# Altium PCB Power-Monitor.PcbDoc
Units mil, origin at the board's own origin, x right, y up, seen from the top; angles counter-clockwise.
Board outline 2185.01 x 2140.14 mil, 2 copper layers (Top Layer, Bottom Layer); 54 components, 43 nets, 223 pads, 153 vias.
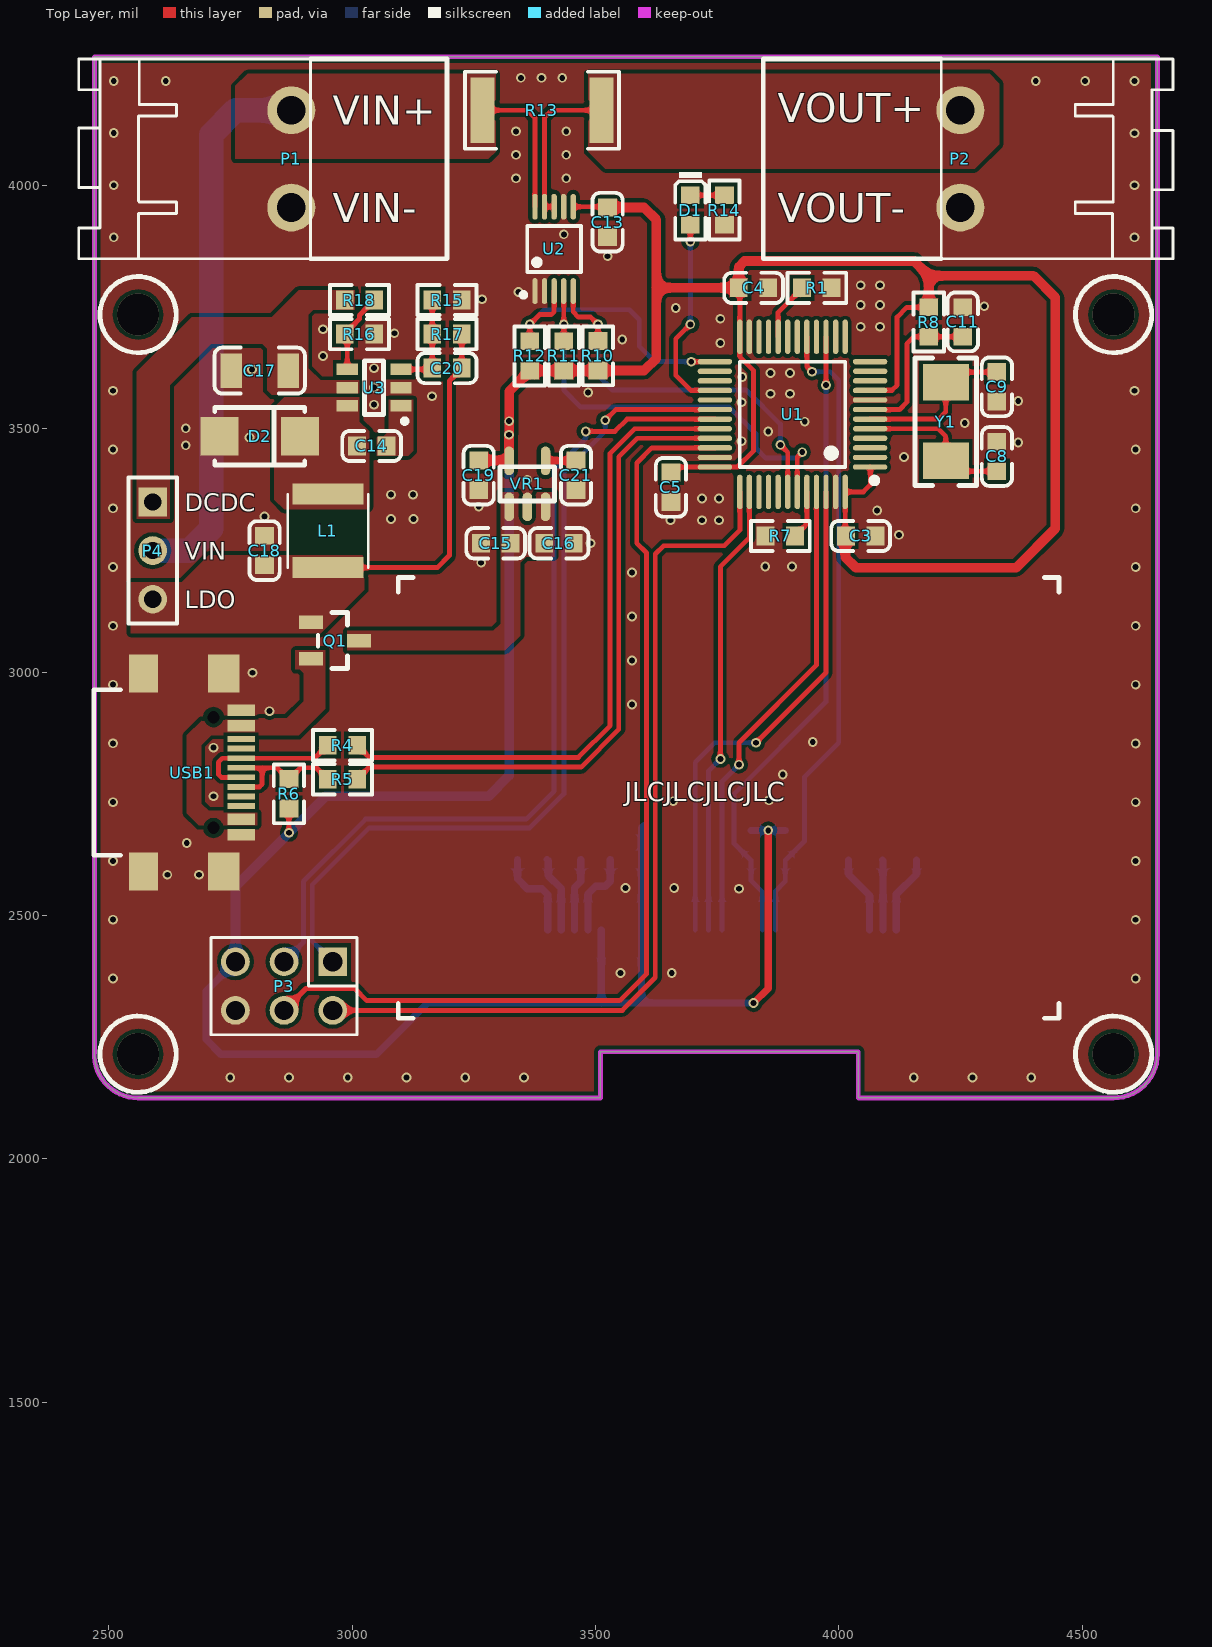
[diagram p0: Top Layer view]
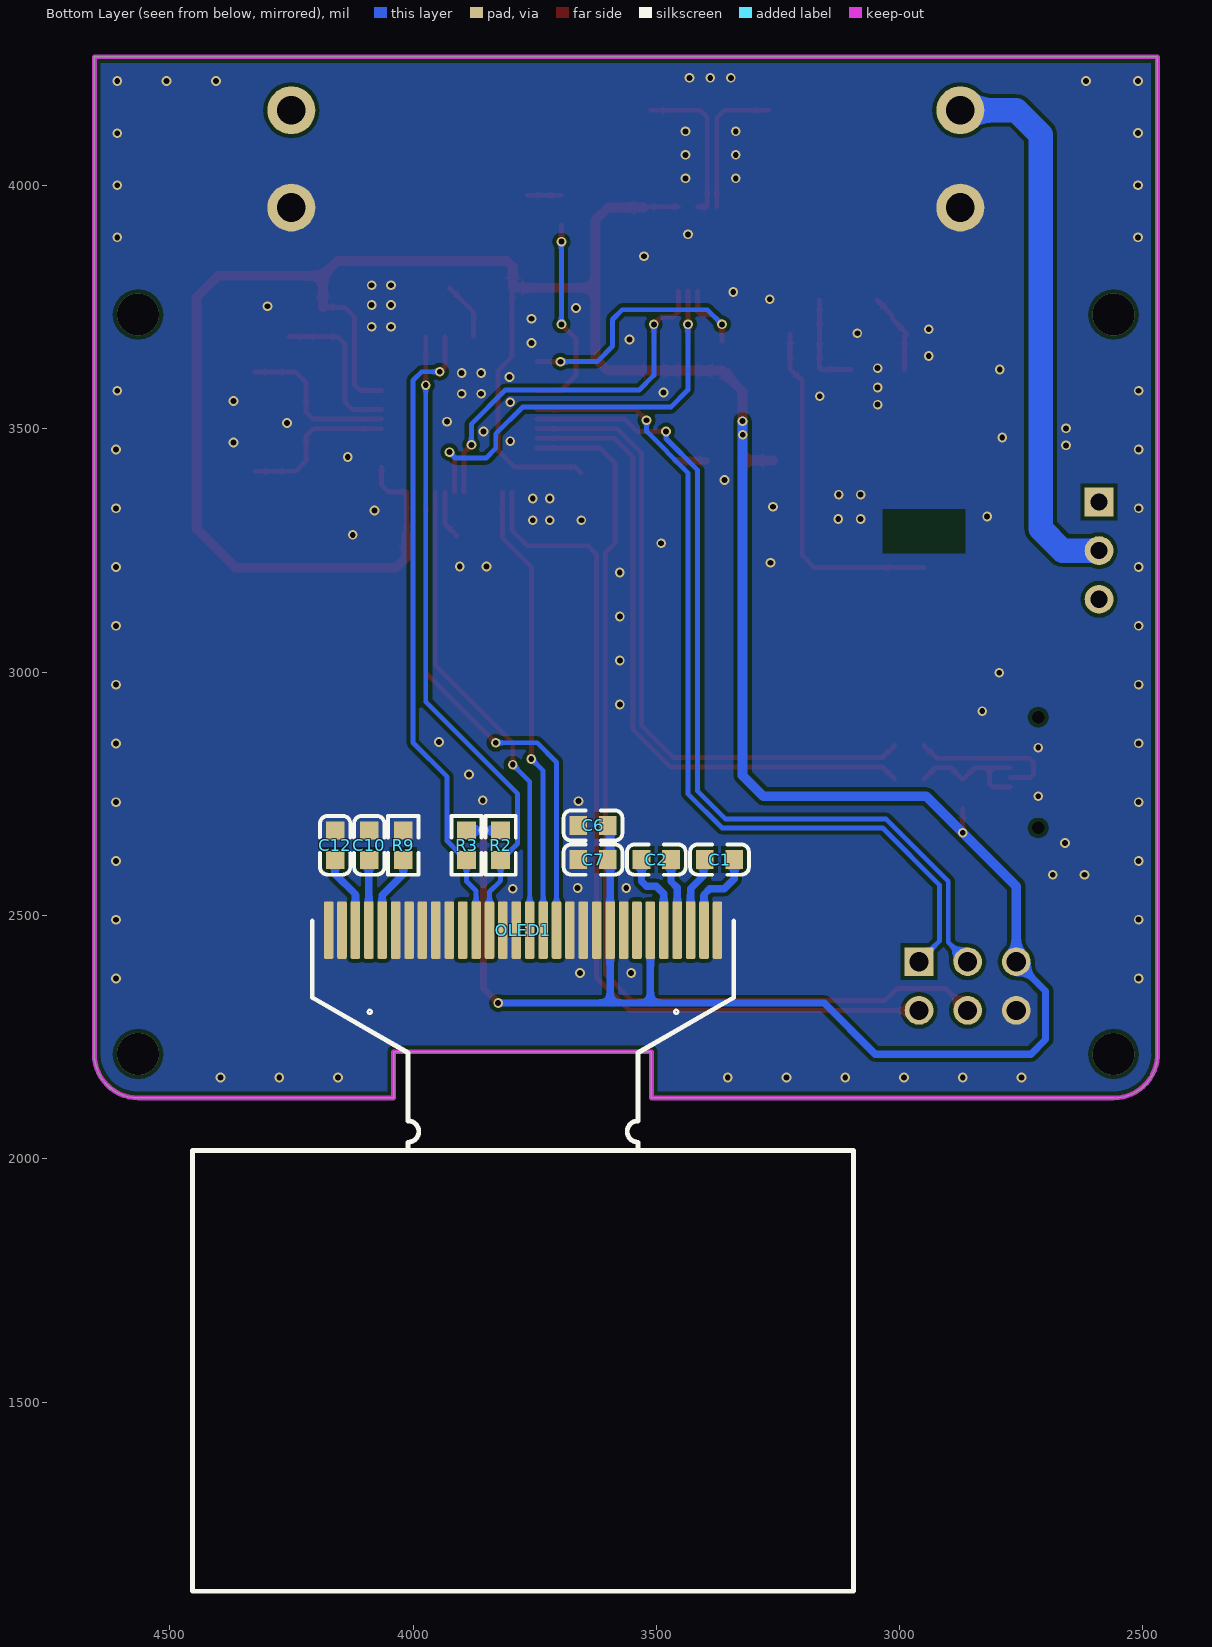
[diagram p1: Bottom Layer view, seen from below]
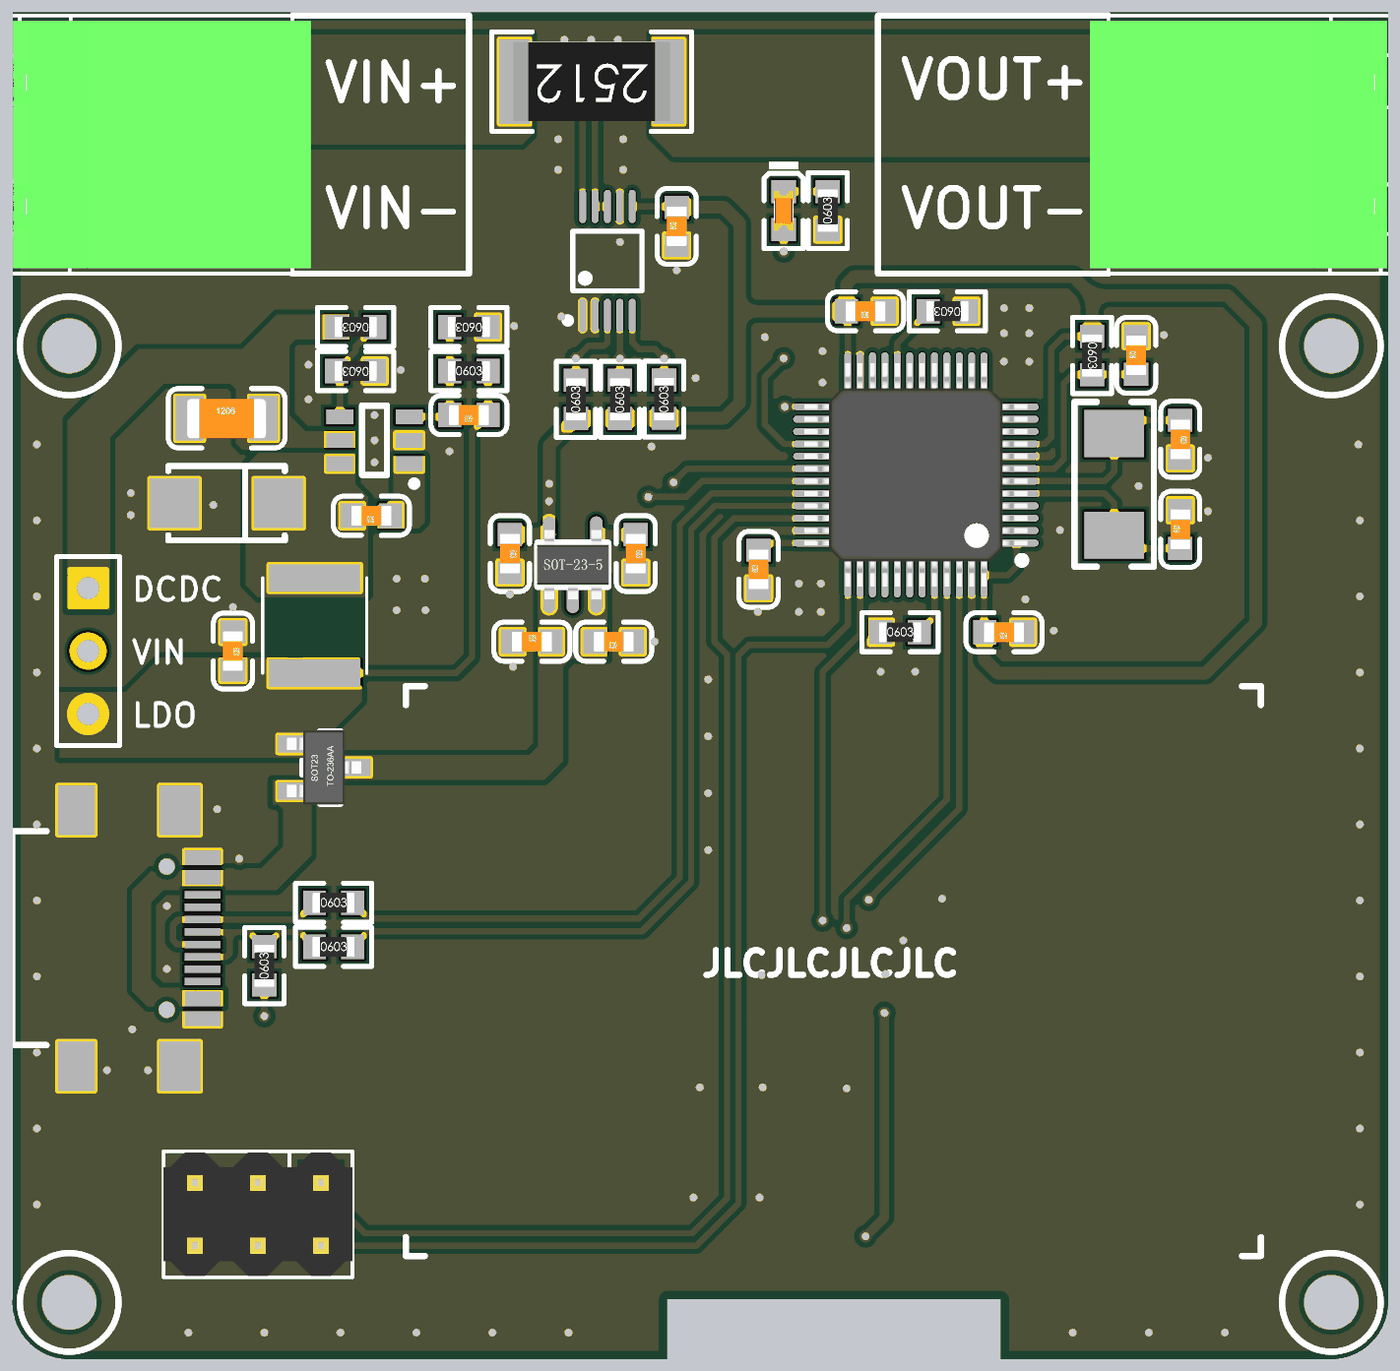
[diagram p2: 3D render of the assembled board from above, using the file's embedded part models]
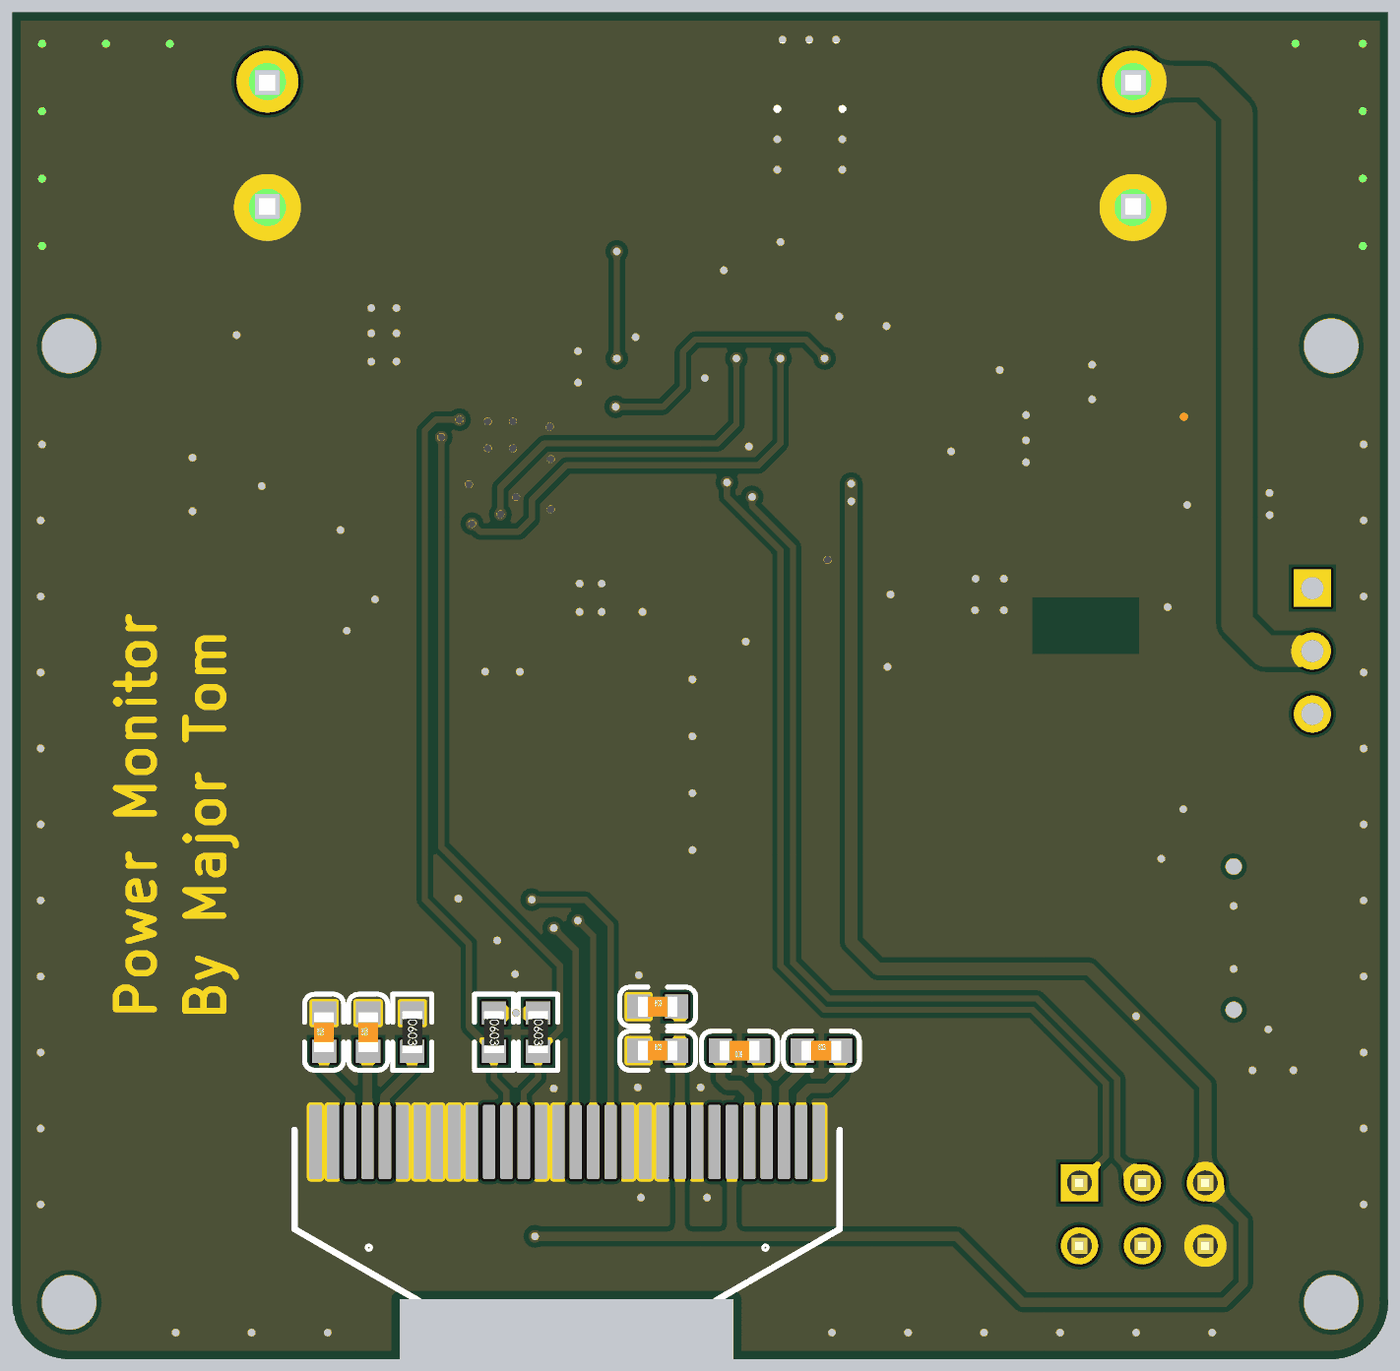
[diagram p3: 3D render of the assembled board from below, using the file's embedded part models]

## Layer stack, top to bottom
Top Solder: solder mask 0.4, Solder Resist, Dk 3.5
Top Layer: signal copper 1.4
Dielectric 1: dielectric 12.6, FR-4, Dk 4.8
Bottom Layer: signal copper 1.4
Bottom Solder: solder mask 0.4, Solder Resist, Dk 3.5

## Board outline
2470,2220 ccw(c2560,2215) 2560,2124.86 2560,2125 3510,2125 3510,2220 4040,2220 4040,2125 4565,2125 ccw(c4565,2215) 4655,2215 4655,4265 2470,4265

## Design rules (kind name [scope] priority, off if disabled: settings)
Clearance [All] p1: gap=8 ignorepadtopadclearanceinfootprint=TRUE except(0: Arc-Hole Track-Hole SMDPad-Hole THPad-Hole Via-Hole Fill-Hole Poly-Hole Region-Hole Text-Hole)
PolygonConnect PolygonConnect_5 [All vs IsNamedPolygon('+5V_BUS_L01_P020') Or IsNamedPolygon('+5V_L01_P022') Or IsNamedPolygon('+5V_USB_L01_P023') Or IsNamedPolygon('+24V_L01_P019') Or IsNamedPolygon('GND_L01_P024') Or IsNamedPolygon('NETC14_1_L01_P015') Or IsNamedPolygon('NETC14_2_L01_P014') Or IsNamedPolygon('VIN+_L01_P013') Or IsNamedPolygon('VIN-_L01_P012') Or IsNamedPolygon('GND_L02_P017')] p1: connectstyle=Direct reliefconductorwidth=10 reliefentries=4 polygonreliefangle="90 Angle" airgapwidth=10
PolygonConnect PolygonConnect_4 [All vs IsNamedPolygon('+5V_BUS_L01_P020') Or IsNamedPolygon('+5V_L01_P022') Or IsNamedPolygon('+5V_USB_L01_P021') Or IsNamedPolygon('+24V_L01_P019') Or IsNamedPolygon('GND_L01_P023') Or IsNamedPolygon('NETC14_1_L01_P015') Or IsNamedPolygon('NETC14_2_L01_P014') Or IsNamedPolygon('VIN+_L01_P013') Or IsNamedPolygon('VIN-_L01_P012') Or IsNamedPolygon('GND_L02_P017')] p2: connectstyle=Direct reliefconductorwidth=10 reliefentries=4 polygonreliefangle="90 Angle" airgapwidth=10
PolygonConnect PolygonConnect_3 [All vs IsNamedPolygon('+5V_BUS_L01_P021') Or IsNamedPolygon('+5V_L01_P024') Or IsNamedPolygon('+5V_USB_L01_P022') Or IsNamedPolygon('+24V_L01_P020') Or IsNamedPolygon('GND_L01_P019') Or IsNamedPolygon('NETC14_1_L01_P015') Or IsNamedPolygon('NETC14_2_L01_P014') Or IsNamedPolygon('VIN+_L01_P013') Or IsNamedPolygon('VIN-_L01_P012') Or IsNamedPolygon('GND_L02_P017')] p3: connectstyle=Direct reliefconductorwidth=10 reliefentries=4 polygonreliefangle="90 Angle" airgapwidth=10
PolygonConnect PolygonConnect_2 [All vs IsNamedPolygon('+5V_USB_L01_P016') Or IsNamedPolygon('+24V_L01_P018') Or IsNamedPolygon('GND_L01_P019') Or IsNamedPolygon('NETC14_1_L01_P015') Or IsNamedPolygon('NETC14_2_L01_P014') Or IsNamedPolygon('VIN+_L01_P013') Or IsNamedPolygon('VIN-_L01_P012') Or IsNamedPolygon('GND_L02_P017')] p4: connectstyle=Direct reliefconductorwidth=10 reliefentries=4 polygonreliefangle="90 Angle" airgapwidth=10
PolygonConnect PolygonConnect_1 [All vs IsNamedPolygon('NONET_L01_P008') Or IsNamedPolygon('NONET_L01_P009') Or IsNamedPolygon('NONET_L01_P010') Or IsNamedPolygon('NONET_L01_P006') Or IsNamedPolygon('NONET_L01_P005') Or IsNamedPolygon('NONET_L01_P003') Or IsNamedPolygon('NONET_L01_P001') Or IsNamedPolygon('NONET_L02_P009')] p5: connectstyle=Direct reliefconductorwidth=10 reliefentries=4 polygonreliefangle="90 Angle" airgapwidth=10
PolygonConnect [All] p6: connectstyle=Relief reliefconductorwidth=10 reliefentries=4 polygonreliefangle="90 Angle" airgapwidth=10
RoutingVias [All] p1: holewidth=28 width=50 viastyle="Through Hole" minholewidth=28 minwidth=50 maxholewidth=28 maxwidth=50
SolderMaskExpansion [All] p1: expansion=4 istentingtop=FALSE
Width [All] p1: maxlimit=50 minlimit=10 preferedwidth=10
30 further rules are at their usual default settings.

## Components (designator, comment, footprint, x,y, rotation, side; value= is the part's Value field where it differs from the comment)
C1 "1uF" 0603_C 3370,2615 r180 bottom
C2 "1uF" 0603_C 3500,2615 r0 bottom
C3 "104" 0603_C 4045,3280 r180 top
C4 "104" 0603_C 3825,3790 r180 top
C5 "104" 0603_C 3655,3380 r90 top
C6 "1uF" 0603_C 3630,2685 r180 bottom
C7 "1uF" 0603_C 3630,2615 r180 bottom
C8 "20pF" 0603_C 4325,3443.46 r90 top locked
C9 "20pF" 0603_C 4325,3586.54 r270 top locked
C10 "4.7uF" 0603_C 4090,2644.33 r90 bottom
C11 "103" 0603_C 4255,3720 r90 top
C12 "2.2uF" 0603_C 4160,2644.33 r90 bottom
C13 "104" 0603_C 3525,3925 r90 top
C14 "104" 0603_C 3040,3465 r180 top
C15 "104" 0603_C 3295,3265 r0 top
C16 "104" 0603_C 3425,3265 r180 top
C17 "4.7uF" 1206_C 2810,3620 r0 top
C18 "10uF" 0603_C 2820,3250 r270 top
C19 "10uF" 0603_C 3260,3405 r270 top
C20 "33pF" 0603_C 3195,3625 r180 top
C21 "104" 0603_C 3460,3405 r270 top
D1 "红灯 0603" 0603_LED_S1 3695,3950 r270 top
D2 "SS14" SMA(DO-214AC)_S1 2810,3485 r180 top
L1 "3.3uH" SMD,4.6x4.1x2.0mm 2950,3366.18 r270 top
OLED1 "SSD1306 1.3" "SSD1306 1.3'" 3295.55,2529.06 r0 bottom locked
P1 "Header 2" CDS-508H-2P 2875,3955 r90 top locked
P2 "Header 2" CDS-508H-2P 4250,4155 r270 top locked
P3 "Header 3X2" 201S2X3 2960,2405 r180 top
P4 "Header 3" HDR1X3 2590,3350 r270 top
Q1 "BAT54C" SOT-23(SOT-23-3) 2965,3065 r180 top
R1 "10K" 0603_R 3955,3790 r180 top
R2 "4.7K" 0603_R 3820,2644.33 r270 bottom
R3 "4.7K" 0603_R 3890,2644.33 r270 bottom
R4 "10Ω" 0603_R 2980,2850 r0 top
R5 "10Ω" 0603_R 2980,2780 r0 top
R6 "1.5KΩ" 0603_R 2870,2750 r90 top
R7 "10K" 0603_R 3880,3280 r0 top
R8 "10K" 0603_R 4185,3719.69 r270 top
R9 "910KΩ" 0603_R 4020,2644.33 r270 bottom
R10 "4.7K" 0603_R 3505,3650.31 r90 top
R11 "4.7K" 0603_R 3435,3650 r90 top
R12 "4.7K" 0603_R 3365,3650 r90 top
R13 "0.01R" 2512_R 3390,4155 r180 top
R14 "510" 0603_R 3765,3950 r90 top
R15 "23.7K" 0603_R 3195,3765 r180 top
R16 "20K" 0603_R 3015,3695 r180 top
R17 "124K" 0603_R 3195,3695 r0 top
R18 "100K" 0603_R 3015,3765 r180 top
U1 "STM32F103C8T6" LQFP-48_7x7x05P 3905,3530 r90 top locked
U2 "INA226" VSSOP-10 3415,3870 r0 top
U3 "MP2451DT" SOT-23-6 3045,3585 r0 top
USB1 "TYPE-C 12P" "TYPE-C 12P 贴片" 2468.94,2963.86 r270 top
VR1 "SPX3819M5-L-3-3" SOT-23-5 3322.6,3340 r90 top
Y1 "8MHz 20pF" SMD-5032_2P 4220,3515 r270 top locked

## Footprints (in the part's own frame and the unit in brackets; to place one, negate y for a bottom-side part, rotate by r counter-clockwise, add the part's x,y. Pads: shape width x height; smd on the part's side, far side on the other; paste and mask are expansions set on the pad)
201S2X3 [mm]
  rect 1.5x1.5 hole 1: 1(0,0)
  round 1.5 hole 1: 2(0,2.54) 3(2.54,0) 4(2.54,2.54) 5(5.08,0) 6(5.08,2.54)
  silkscreen extent -1.27,-1.27 6.35,3.81, body extent -1.27,-1.23 6.35,3.77, height 8.4
0603_C [mm]
  rect 0.93x0.98 smd: 1(-0.77,0) 2(0.77,0)
  silkscreen extent -1.53,-0.79 1.54,0.79, body extent -0.8,-0.4 0.8,0.4, height 0.3
0603_LED_S1 [mm]
  rect 0.93x0.98 smd: A(0.77,0) K(-0.77,0)
  silkscreen extent -1.98,-0.79 1.54,0.79, body extent -0.8,-0.4 0.8,0.4, height 0.6
0603_R [mm]
  rect 0.93x0.98 smd: 1(-0.77,0) 2(0.77,0)
  silkscreen extent -1.53,-0.79 1.54,0.79, body extent -0.85,-0.4 0.85,0.4, height 0.56
1206_C [mm]
  rect 1.13x1.8 smd: 1(-1.49,0) 2(1.49,0)
  silkscreen extent -2.36,-1.2 2.35,1.2, body extent -1.6,-0.81 1.6,0.79, height 1
2512_R [mm]
  rect 1.25x3.42 smd: 1(-3.1,0) 2(3.1,0)
  silkscreen extent -4.03,-2.01 4.02,2.01, body extent -3.16,-1.6 3.16,1.6, height 0.62
CDS-508H-2P [mm]
  round 2.5 hole 1.5: 1(0,0) 2(5.08,0)
  silkscreen extent -2.67,-1 7.75,11.1, body extent -2.46,-1.74 7.54,10.26, height 8.47
HDR1X3 [mm] "Connector; Header; 3 Position"
  rect 1.5x1.5 hole 0.9: 1(0,0)
  round 1.5 hole 0.9: 2(2.54,0) 3(5.08,0)
  silkscreen extent -1.27,-1.27 6.35,1.27
LQFP-48_7x7x05P [mm]
  oval 0.28x1.8 smd mask+0.051: 1(-2.75,-4.05) 2(-2.25,-4.05) 3(-1.75,-4.05) 4(-1.25,-4.05) 5(-0.75,-4.05) 6(-0.25,-4.05) 7(0.25,-4.05) 8(0.75,-4.05) 9(1.25,-4.05) 10(1.75,-4.05) 11(2.25,-4.05) 12(2.75,-4.05) 25(2.75,4.05) 26(2.25,4.05) 27(1.75,4.05) 28(1.25,4.05) 29(0.75,4.05) 30(0.25,4.05) 31(-0.25,4.05) 32(-0.75,4.05) 33(-1.25,4.05) 34(-1.75,4.05) 35(-2.25,4.05) 36(-2.75,4.05)
  oval 1.8x0.28 smd mask+0.051: 13(4.05,-2.75) 14(4.05,-2.25) 15(4.05,-1.75) 16(4.05,-1.25) 17(4.05,-0.75) 18(4.05,-0.25) 19(4.05,0.25) 20(4.05,0.75) 21(4.05,1.25) 22(4.05,1.75) 23(4.05,2.25) 24(4.05,2.75) 37(-4.05,2.75) 38(-4.05,2.25) 39(-4.05,1.75) 40(-4.05,1.25) 41(-4.05,0.75) 42(-4.05,0.25) 43(-4.05,-0.25) 44(-4.05,-0.75) 45(-4.05,-1.25) 46(-4.05,-1.75) 47(-4.05,-2.25) 48(-4.05,-2.75)
  silkscreen extent -3.6,-4.42 2.75,2.75, body extent -4.5,-4.5 4.5,4.5, height 1.6
SMA(DO-214AC)_S1 [mm]
  rect 2x2 smd: 1(2.1,0) 2(-2.1,0)
  silkscreen extent -2.35,-1.5 2.35,1.5
SMD,4.6x4.1x2.0mm [mm]
  rect 1.1x3.7 smd: 1(0,0) 2(3.84,0)
  silkscreen extent 0,-2.1 3.84,2.1
SMD-5032_2P [mm]
  rect 1.9x2.4 smd: 1(-2.05,0) 2(2.05,0)
  silkscreen extent -3.33,-1.6 3.32,1.6
SOT-23(SOT-23-3) [mm]
  rect 1.25x0.7 smd: 1(1.25,-0.95) 2(1.25,0.95) 3(-1.25,0)
  silkscreen extent -0.65,-1.46 0.9,1.46, body extent -1.5,-1.5 1.5,1.5, height 1.3
SOT-23-5 [mm]
  oval 1.5x0.5 smd: 1(0,0) 2(0,-0.95) 3(0,-1.9) 4(2.4,-1.9) 5(2.4,0)
  silkscreen extent 0.31,-2.38 2.09,0.48, body extent -0.2,-2.4 2.6,0.5, height 1.2
SOT-23-6 [mm]
  rect 1.1x0.6 smd: 1(1.4,-0.95) 2(1.4,0) 3(1.4,0.95) 4(-1.4,0.95) 5(-1.4,0) 6(-1.4,-0.95)
  silkscreen extent -0.5,-1.87 1.73,1.4
"SSD1306 1.3'" [mm]
  rrect30% 0.5x3 smd: 1(2,1.5) 2(2.7,1.5) 3(3.4,1.5) 4(4.1,1.5) 5(4.8,1.5) 6(5.5,1.5) 7(6.2,1.5) 8(6.9,1.5) 9(7.6,1.5) 10(8.3,1.5) 11(9,1.5) 12(9.7,1.5) 13(10.4,1.5) 14(11.1,1.5) 15(11.8,1.5) 16(12.5,1.5) 17(13.2,1.5) 18(13.9,1.5) 19(14.6,1.5) 20(15.3,1.5) 21(16,1.5) 22(16.7,1.5) 23(17.4,1.5) 24(18.1,1.5) 25(18.8,1.5) 26(19.5,1.5) 27(20.2,1.5) 28(20.9,1.5) 29(21.6,1.5) 30(22.3,1.5)
  silkscreen extent -5.1,1.02 29.4,36.02
"TYPE-C 12P 贴片" [mm]
  rect 2x1.65 smd: 0(-0.85,6.78) 0(9.49,6.78)
  rect 2x1.5 smd: 0(-0.85,2.6) 0(9.49,2.6)
  round 0 hole 0.65: 5(1.43,6.25) 5(7.21,6.25)
  rect 0.3x1.45 smd: A1(0.92,7.695) A4(1.72,7.695) A5(3.07,7.695) A6(4.07,7.695) A7(4.57,7.695) A8(5.57,7.695) A9(6.92,7.695) A12(7.72,7.695) B1(7.42,7.695) B4(6.62,7.695) B5(6.07,7.695) B6(5.07,7.695) B7(3.57,7.695) B8(2.57,7.695) B9(2.02,7.695) B12(1.22,7.695)
  silkscreen extent 0,0 8.64,1.4, body extent 0,0 8.64,8, height 3.21
VSSOP-10 [mm]
  oval 0.28x1.35 smd mask+0.051: 1(-1,-2.2) 2(-0.5,-2.2) 3(0,-2.2) 4(0.5,-2.2) 5(1,-2.2) 6(1,2.2) 7(0.5,2.2) 8(0,2.2) 9(-0.5,2.2) 10(-1,2.2)
  silkscreen extent -1.72,-2.52 1.4,1.2

## Part data
C1 C2 C3 C4 C5 C6 C7 C8 C9 C10 C12 C13 C14 C15 C16 C17 C18 C19 C20 C21: library part "0603 2.7pF (2R7) 0.25pF 50V", "贴片电容", Package=0603, SuppliersPartNumber=C16149, ComponentLink1Description=供应商链接, ComponentLink1URL=http://www.szlcsc.com/product/details_16831.html, Supplier=LC
C11: library part Cap, "Capacitor", LatestRevisionDate=17-Jul-2002, LatestRevisionNote="Re-released for DXP Platform.", PackageReference=RAD-0.3, Published=8-Jun-2000, Publisher="Altium Limited"
D1: library part "0805 红灯", "发光二极管", Package=0805, SuppliersPartNumber=C2295, ComponentLink1Description=供应商链接, ComponentLink1URL=http://www.szlcsc.com/product/details_2668.html, Supplier=LC
D2: library part "SMA(DO-214AC) SS54", "二极管", Package=SMA(DO-214AC), SuppliersPartNumber=C22452, ComponentLink1Description=供应商链接, ComponentLink1URL=http://www.szlcsc.com/product/details_23178.html, Supplier=LC
L1: library part 电感, "贴片电感"
P1 P2: "Header, 2-Pin", LatestRevisionDate=17-Jul-2002, LatestRevisionNote="Re-released for DXP Platform.", Publisher="Altium Limited"
P3: "Header, 3-Pin, Dual row", LatestRevisionDate=17-Jul-2002, LatestRevisionNote="Re-released for DXP Platform.", Publisher="Altium Limited"
P4: "Header, 3-Pin", LatestRevisionDate=17-Jul-2002, LatestRevisionNote="Re-released for DXP Platform.", Publisher="Altium Limited"
Q1: "BAT54C/KL3"
R1 R2 R3 R7 R8 R10 R11 R12 R13 R15 R16 R17 R18: library part Res2, "Resistor", LatestRevisionDate=17-Jul-2002, LatestRevisionNote="Re-released for DXP Platform.", PackageReference=AXIAL-0.4, Published=8-Jun-2000, Publisher="Altium Limited"
R4 R5 R6 R9 R14: library part "0603 330Ω (3300) 1%", "贴片电阻", Package=0603, SuppliersPartNumber=C23138, ComponentLink1Description=供应商链接, ComponentLink1URL=http://www.szlcsc.com/product/details_23865.html, Supplier=LC
U1: "ARM", Package=LQFP-48_7x7x05P, SuppliersPartNumber=C8734, ComponentLink1Description=供应商链接, ComponentLink1URL=http://www.szlcsc.com/product/details_9243.html, Supplier=LC
U3: "DCDC  36V 0.6A"
Y1: library part "SMD-5032_2P 8MHz 20ppm 20pF", "贴片晶振", Package=SMD-5032_2P, SuppliersPartNumber=C115962, ComponentLink1Description=供应商链接, ComponentLink1URL=http://www.szlcsc.com/product/details_117214.html, Supplier=LC

## Via types
v1: diameter 20, hole 12, Top Layer to Bottom Layer, tented both sides, 149 vias
v2: diameter 86.61, hole 86.61, Top Layer to Bottom Layer, 4 vias

## Nets (pads, with @x,y where several pads share a name; then routed paths per layer and width w, separated by ;. In a path a pad name is that pad's centre, name@x,y a point inside that pad or via, vN(x,y) a via of type N, cw(c..) or ccw(c..) an arc to the next point about the centre after c; other vN are vias at no path point)
+3.3V: C3.2 C4.2 C5.2 C6.2 C7.2 C13.2 C19.1 OLED1.6 OLED1.9 P3.5 R2.1 R3.1 R6.1 R8.1 R10.1 R11.1 R12.1 U1.1 U1.9 U1.24 U1.36 U1.48 U2.6 VR1.5 | length 7867.5
  Top Layer w10: v1(2870,2670) R6.1 ; U2.6 3523.7,3956.61 C13.2 ; C5.2 3666.42,3421.73 U1.36 3745.75,3421.93 3791.93,3421.93 3825,3455 3825,3620 3796.73,3648.27 U1.24 3796.73,3787.95 C4.2 ; C3.2 4013.27,3281.42 U1.48 4050.55,3370.55 4065,3385 4065,3421.26 4064.53,3421.73 U1.1 ; U1.9 4109.21,3579.21 4120,3590 4120,3730 4140,3750 R8.1
  Top Layer w15: VR1.5@3322.19,3434.9 3322.44,3434.65 VR1.5 ; v1(3825,2320) 3855,2350 v1(3855,2675)
  Top Layer w20: C19.1 VR1.5@3322.44,3435.31 ; VR1.5@3322.44,3434.65 VR1.5@3322.44,3435.31 ; VR1.5 3322.6,3435.16 VR1.5@3322.44,3435.31 ; R12.1 3364.02,3619.69 3355.71,3611.38 3355.71,3610.39 3322.6,3577.28 v1(3322.6,3516.04) 3322.6,3488.3 v1(3322.38,3488.08) 3322.44,3488.02 VR1.5@3322.44,3435.31 ; R12.1@3365,3620 R10.1 3600,3620 3625,3645 3625,3790 ; C13.2 3599.69,3955.31 3625,3930 3625,3790 ; C3.2@4013.27,3281.42 4013.27,3236.73 4035,3215 4365,3215 4445,3295 4445,3770 4400,3815 4185,3815 ; R8.1 4185,3815 ; 3625,3790 C4.2 3794.68,3833.28 3806.4,3845 4155,3845 4185,3815
  Bottom Layer w15: P3.5 2700,2345 2700,2245 2730,2215 3050,2215 3155,2320 3512.09,2320 ; OLED1.6 3512.09,2320 ; C6.2 3594.76,2680.08 OLED1.9 3594.76,2320 ; R2.1 R3.1 ; v1(3825,2320) 3594.76,2320 ; 3512.09,2320 3594.76,2320
  Bottom Layer w20: P3.5 2760,2560 v1(2870,2670) 2945,2745 3280,2745 3322.6,2787.6 v1(3322.6,3516.04)
+5V: C15.2 C16.2 Q1.3 VR1.1 VR1.3
+5V_BUS: C18.2 C20.1 L1.2 P4.3 Q1.1 R17.2 | length 725.8
  Top Layer w10: L1.2 3175,3215 3200,3240 3200,3598.7 3225.31,3624.02 C20.1 R17.2
+5V_USB: Q1.2 USB1.A4 USB1.A9 USB1.B4 USB1.B9
+24V: C17.2 P4.1 R18.2 U3.5
GND: C3.1 C4.1 C5.1 C6.1 C7.1 C8.2 C9.2 C10.2 C11.2 C12.2 C13.1 C15.1 C16.1 C17.1 C18.1 C19.2 C21.2 D2.1 OLED1.1 OLED1.8 OLED1.10 OLED1.11 OLED1.12 OLED1.16 OLED1.17 OLED1.21 OLED1.22 OLED1.23 OLED1.24 OLED1.25 OLED1.29 OLED1.30 P1.1 P2.2 P3.6 R1.1 R7.1 R9.1 R14.1 R15.1 R16.1 U1.8 U1.23 U1.35 U1.47 U2.1 U2.2 U2.7 U3.2 USB1.0 USB1.A1 USB1.A12 USB1.B1 USB1.B12 VR1.2
  other v1: 2749.25,2167.03 2870.03,2167.03 2990.8,2167.03 3111.57,2167.03 3232.35,2167.03 3353.16,2167.03 4154.25,2167.03 4275.03,2167.03 4395.8,2167.03 2508.56,2370.6 4610.24,2370.6 3551.67,2381.63 3656.67,2381.63 2508.56,2491.42 4610.24,2491.38 3795,2555 3561.67,2556.63 3661.67,2556.63 2620.09,2583.83 2685.09,2583.83 2508.56,2612.2 4610.24,2612.16 2660.09,2648.83 2508.56,2732.97 4610.24,2732.94 3660,2735 3856.67,2736.63 2715,2745 3885,2790 2715,2845 2508.56,2853.74 4610.24,2853.72 3946.67,2856.63 2830,2920 3574.89,2933.78 4610.24,2974.49 2508.56,2974.52 2795.09,2998.83 3574.89,3024.18 2508.56,3095.29 4610.24,3095.27 3574.89,3114.59 3575,3205 2508.56,3216.06 4610.24,3216.05 3849,3217.28 3904,3217.28 3265,3225 3490,3265 4124,3282.28 3654,3312.28 3719,3312.28 3754,3312.28 3080,3315 3126,3315 2820,3320 4079,3332.28 2508.56,3336.84 4610.24,3336.83 3260,3340 3719,3357.28 3754,3357.28 3080,3365 3125,3365 3360,3395 4134,3442.28 2508.56,3457.61 4610.24,3457.61 2657.92,3466.27 4369,3472.28 3800,3475 2789,3482.28 3855,3495 2657.92,3501.27 4259,3512.28 3930,3515 3045,3550 3800,3555 4369,3557.28 3164,3567.28 3860,3572.28 3900,3572.28 3485,3575 2508.56,3578.38 4608.01,3578.38 3045,3585 3801.67,3606.63 3860,3615 3900,3615 2794,3622.28 3045,3625 2940,3650 3756.67,3676.63 3555.09,3683.83 3086.67,3696.63 2940,3705 4045,3710.2 4085,3710 3756.67,3726.63 3665.09,3748.83 4299,3752.28 4045,3755 4085,3755 3266.67,3766.63 3341.67,3781.63 4045,3795.2 4085,3795.2 3525,3855 2509.89,3893.78 4608.01,3893.78 3435,3900 2509.89,4000.91 4608.01,4000.72 3336.67,4015 3440,4015 3336.67,4063.32 3440,4063.32 2509.89,4108.05 4608.01,4107.67 3336.67,4111.63 3440,4111.63 2509.89,4215.19 2616.93,4215.19 4405,4215 4506.5,4215.19 4608.01,4215.19 3346.67,4221.63 3389.17,4221.63 3431.67,4221.63
I2C1_SCL: R10.2 U1.42 U2.5 | length 805.5
  Top Layer w10: U2.5 3454.37,3740.63 3465,3730 3490,3730 v1(3505,3715) R10.2 ; v1(3880,3467.29) 3895.16,3452.14 U1.42
  Bottom Layer w10: v1(3505,3715) 3505,3610 3535,3580 3810,3580 3880,3510 v1(3880,3467.29)
I2C1_SDA: R11.2 U1.43 U2.4 | length 894.8
  Top Layer w10: U2.4 3434.84,3783.23 3434.84,3715.16 v1(3435,3715) R11.2 ; U1.43 3914.84,3442.14 v1(3925,3452.29)
  Bottom Layer w10: v1(3435,3715) 3435,3580 3470,3545 3775,3545 3830,3490 3830,3460 3850,3440 3912.71,3440 v1(3925,3452.29)
INA226_AL: R12.2 U1.25 U2.3 | length 607.3
  Top Layer w10: R12.2 v1(3365,3715) 3385,3735 3409.14,3735 3415,3740.86 U2.3 ; v1(3696.73,3638.27) U1.25
  Bottom Layer w10: v1(3365,3715) 3395,3745 3570,3745 3590,3725 3590,3670 3621.73,3638.27 v1(3696.73,3638.27)
LED: D1.A U1.28 | length 415.4
  Top Layer w10: v1(3695,3715) 3665,3685 3665,3610 3695.79,3579.21 U1.28 ; v1(3695,3885) D1.A
  Bottom Layer w10: v1(3695,3715) v1(3695,3885)
NetC1_1: C1.1 OLED1.3 | length 157.1
  Bottom Layer w15: C1.1 3403,2612.31 3403,2582 3429.41,2555.59 OLED1.3
NetC1_2: C1.2 OLED1.2 | length 188.3
  Bottom Layer w15: C1.2 3339.69,2575.31 3360,2555 3390,2555 3401.85,2543.15 OLED1.2
NetC2_1: C2.1 OLED1.4 | length 150.3
  Bottom Layer w15: OLED1.4 3456.97,2556.97 3469.68,2569.68 C2.1
NetC2_2: C2.2 OLED1.5 | length 175.7
  Bottom Layer w15: OLED1.5 3484.53,2544.53 3500,2560 3520,2560 3530.32,2570.32 C2.2
NetC8_1: C8.1 U1.5 Y1.2 | length 326.4
  Top Layer w10: U1.5 4204.53,3500.47 4220,3485 Y1.2 4241.14,3413.15 C8.1
NetC9_1: C9.1 U1.6 Y1.1 | length 336.2
  Top Layer w10: U1.6 4205.16,3520.16 4220,3535 Y1.1 4241.14,3616.85 C9.1
NetC10_1: C10.1 OLED1.27 | length 144.4
  Bottom Layer w15: C10.1 4090.83,2613.19 OLED1.27
NetC11_1: C11.1 R8.2 U1.7 | length 322.9
  Top Layer w10: U1.7 4124.84,3539.84 4140,3555 4140,3675 4154.37,3689.37 R8.2 4185.32,3689.69 C11.1
NetC12_1: C12.1 OLED1.28 | length 161.3
  Bottom Layer w15: OLED1.28 4118.38,2543.38 4160,2585 C12.1
NetC14_1: C14.1 U3.1
NetC14_2: C14.2 D2.2 L1.1 U3.6
NetC20_2: C20.2 R15.2 R17.1 U3.3 | length 205.6
  Top Layer w10: U3.3 3162.09,3622.4 C20.2 R17.1 R15.2
NetC21_1: C21.1 VR1.4 | length 62.9
  Top Layer w15: VR1.4 3397.81,3434.9 3459.59,3434.9 C21.1
NetD1_K: D1.K R14.2 | length 70
  Top Layer w10: D1.K R14.2
NetOLED1_26: OLED1.26 R9.2 | length 161.9
  Bottom Layer w15: R9.2 4020,2585 4063.27,2541.73 OLED1.26
NetR1_2: R1.2 U1.20 | length 121
  Top Layer w10: U1.20 3875.47,3739.88 3911.3,3775.71 3911.38,3775.71 3924.68,3789.02 R1.2
NetR4_2: R4.2 U1.32 | length 1354
  Top Layer w10: R4.2 3010.32,2849.02 3023.62,2835.71 3024.61,2835.71 3035.32,2825 3465,2825 3530,2890 3530,3450 3580.47,3500.47 U1.32
NetR5_2: R5.2 U1.33 | length 1354.1
  Top Layer w10: R5.2 3010.32,2780.98 3023.62,2794.29 3024.61,2794.29 3035.32,2805 3470.46,2805 3548,2882.54 3548,3442.54 3586.24,3480.79 U1.33
NetR7_2: R7.2 U1.44 | length 100.6
  Top Layer w10: R7.2 3910.32,3280.98 3934.53,3305.2 U1.44
NetR16_2: R16.2 R18.1 U3.4 | length 170.8
  Top Layer w10: R16.2 R16.2@2984.69,3695.98 ; U3.4 2989.88,3690.79 R16.2@2984.69,3695.98 ; R18.1 3045.31,3764.02 3015,3733.7 3015,3726.3 R16.2@2984.69,3695.98
OLED_CS: OLED1.13 U1.46 | length 1061.7
  Top Layer w10: v1(3830,2855) 3973.9,2998.9 U1.46
  Bottom Layer w10: OLED1.13 3705,2815 3745,2855 v1(3830,2855)
OLED_DC: OLED1.15 U1.45 | length 980.9
  Top Layer w10: v1(3795,2810) 3795,2855 3954.21,3014.21 U1.45
  Bottom Layer w10: OLED1.15 3760.12,2775.12 v1(3795,2810)
OLED_RST: OLED1.14 U1.38 | length 935.3
  Top Layer w10: v1(3756.83,2821.83) 3756.83,3216.83 3816.42,3276.42 U1.38
  Bottom Layer w10: OLED1.14 3732.56,2797.56 v1(3756.83,2821.83)
SPI1_MOSI: OLED1.19 R3.2 U1.17 | length 1322.7
  Top Layer w10: U1.17 3934.53,3628.18 v1(3945,3617.71)
  Bottom Layer w10: OLED1.19 3870.35,2550.35 3890,2570 R3.2 3890.98,2614.02 3930,2653.03 3930,2785 4000,2855 4000,3600 3982.29,3617.71 v1(3945,3617.71)
SPI1_SCLK: OLED1.18 R2.2 U1.15 | length 1322.2
  Top Layer w10: v1(3973.9,3590) U1.15
  Bottom Layer w10: OLED1.18 3842.8,2548.63 3820,2571.42 R2.2 3819.02,2614.02 3785,2648.03 3785,2750 3973.9,2938.9 v1(3973.9,3590)
SWCLK: P3.2 U1.37 | length 1834.2
  Top Layer w10: P3.2 3555.46,2305 3623,2372.54 3623,3243 3640,3260 3765,3260 3796.73,3291.73 U1.37
SWDIO: P3.4 U1.34 | length 2028.5
  Top Layer w10: P3.4 2905,2350 3005,2350 3030,2325 3550,2325 3605,2380 3605,3245 3585,3265 3585,3430 3616,3461 3745.45,3461 U1.34
U1_RXD: P3.3 U1.31 | length 1816.1
  Top Layer w10: v1(3480,3495) 3540,3495 3565.16,3520.16 U1.31
  Bottom Layer w10: P3.3 2900,2445 2900,2545 2900,2570.46 3027.54,2698 3053,2698 3357.54,2698 3415,2755.46 3415,3415.46 3480,3480.46 v1(3480,3495)
U1_TXD: P3.1 U1.30 | length 1807.7
  Top Layer w10: v1(3520,3518) 3541.84,3539.84 U1.30
  Bottom Layer w10: P3.1 2918,2447 2918,2563 3035,2680 3365,2680 3435,2750 3435,3410 3520,3495 v1(3520,3518)
"USB D+": R5.1 R6.2 USB1.A6 USB1.B6 | length 286.5
  Top Layer w10: USB1.B6 2809.14,2764.25 2815,2770.11 2815,2803.62 ; USB1.A6 2815,2803.62 ; R5.1 2949.69,2780.98 2936.38,2794.29 2935.39,2794.29 2926.06,2803.62 2894.29,2803.62 2870.98,2780.32 R6.2 2869.02,2780.32 2845.71,2803.62 2815,2803.62
"USB D-": R4.1 USB1.A7 USB1.B7 | length 314.2
  Top Layer w10: USB1.A7 2731.06,2783.94 2725,2790 2725,2815 2733.31,2823.31 USB1.B7 2922.99,2823.31 2935.39,2835.71 2936.38,2835.71 2949.69,2849.02 R4.1
VIN+: P1.2 P4.2 R13.2 U2.10 | length 1431.3
  Top Layer w10: R13.2 3360,4155 3375.63,4139.37 U2.10
  Bottom Layer w50: P4.2 2665,3250 2710,3295 2710,4105 2760,4155 P1.2
VIN-: P2.1 R13.1 U2.8 U2.9 | length 326.2
  Top Layer w10: U2.8 U2.9 3395.31,4140.31 3410,4155 R13.1
pads on no net: OLED1.7 OLED1.20 U1.2 U1.3 U1.4 U1.10 U1.11 U1.12 U1.13 U1.14 U1.16 U1.18 U1.19 U1.21 U1.22 U1.26 U1.27 U1.29 U1.39 U1.40 U1.41 USB1.5 USB1.A5 USB1.A8 USB1.B5 USB1.B8
copper on no net:
  other v2: 2560,2215 4565,2215 2560,3735 4565,3735

## Polygon pours and split planes (outlines as drawn)
+5V_BUS on Top Layer "+5V_BUS_L01_P020" (solid, pour order 20): 2545,3185 2650,3185 2705,3240 3025,3240 3025,3170 2935,3080 2545,3080
VIN+ on Top Layer "VIN+_L01_P013" (solid, pour order 13): 3280,4055 3295,4070 3295,4230 2785,4230 2760,4205 2760,4055
VIN- on Top Layer "VIN-_L01_P012" (solid, pour order 12): 3485,4230 4310,4230 4330,4210 4330,4085 4280,4035 3520,4035 3485,4070
GND on Top Layer "GND_L01_P024" (solid, pour order 24): 2470,2220 ccw(c2560,2215) 2560,2124.86 2560,2125 3510,2125 3510,2220 4040,2220 4040,2125 4565,2125 ccw(c4565,2215) 4655,2215 4655,4265 2470,4265
+5V_USB on Top Layer "+5V_USB_L01_P023" (solid, pour order 23): 2883.18,3045 2945,3045 2945,2925 2890,2870 2710,2870 2690,2850 2690,2730 2705,2715 2805,2715 2805,2685 2685,2685 2660,2710 2660,2870 2695,2905 2865,2905 2900,2940 2900,2997.66 2891.84,3005.82 2883.18,3005.82
+5V on Top Layer "+5V_L01_P022" (solid, pour order 22): 2990,3085 3290,3085 3305,3100 3305,3370 3415,3370 3415,3237.71 3357.71,3237.71 3345,3225 3345,3075 3315,3045 2990,3045
+24V on Top Layer "+24V_L01_P019" (solid, pour order 19): 2557.23,3315 2625,3315 2625,3590 2710,3675 2815,3675 2825,3665 2825,3580 2835,3570 3015,3570 3015,3600 2935,3600 2910,3625 2910,3735 2920,3745 3005,3745 3005,3785 2890,3785 2835,3730 2670,3730 2557.23,3617.23
NetC14_2 on Top Layer "NETC14_2_L01_P014" (solid, pour order 14): 3015,3565 3015,3515 3035,3495 3035,3340 3030,3335 2860,3335 2840,3355 2840,3545 2860,3565
NetC14_1 on Top Layer "NETC14_1_L01_P015" (solid, pour order 15): 3075,3560 3125,3560 3125,3455 3115,3445 3050,3445 3050,3485 3065,3485 3075,3495
GND on Bottom Layer "GND_L02_P017" (solid, pour order 17): 2470,2220 ccw(c2560,2215) 2560,2124.86 2560,2125 3510,2125 3510,2220 4040,2220 4040,2125 4565,2125 ccw(c4565,2215) 4655,2215 4655,4265 2470,4265

## Keep-outs
Keep-Out Layer:
  lines w10: 2560,2124.86 cw(c2560,2215) 2470,2220 2470,4265 4655,4265 4655,2215 cw(c4565,2215) 4565,2125 4040,2125 4040,2220 3510,2220 3510,2125 2560,2125

## Other copper
Top Layer:
  pour cut-out: 2865,3335 3035,3335 3035,3245 2865,3245
Bottom Layer:
  pour cut-out: 2865,3335 3035,3335 3035,3245 2865,3245

## Silkscreen, mask and mechanical layers (free items; w line width, h text height)
Top Overlay:
  circle w10: c2560,3735 r78.35
  circle w10: c4565,3735 r78.35
  circle w10: c4565,2215 r78.35
  circle w10: c2560,2215 r78.35
  lines w10: 2914.37,3849.88 3195,3849.88 3195,4260.12 2914.37,4260.12 ; 3094.75,2318.83 3094.75,2288.83 3124.75,2288.83 ; 3094.75,3164.34 3094.75,3194.34 3124.75,3194.34 ; 4210.63,3849.88 3845,3849.88 3845,4260 4210.63,4260 4210.63,4260.12 ; 4423.02,2288.83 4453.02,2288.83 4453.02,2318.83 ; 4423.02,3194.34 4453.02,3194.34 4453.02,3164.34
  text "VOUT+" at 3875,4130 h60
  text "VIN+" at 2960,4125 h60
  text "VIN-" at 2960,3925 h60
  text "VOUT-" at 3875,3925 h60
  text "DCDC" at 2656,3331 h36
  text "VIN" at 2656,3231 h36
  text "LDO" at 2656,3131 h36
  text "JLCJLCJLCJLC" at 3560,2735 h39.37
Bottom Solder:
  text "Power Monitor" at 4430,2660 h60 r270
  text "By Major Tom" at 4319.74,2657.53 h60 r270
Mechanical 1:
  lines w10: 2560,2124.86 cw(c2560,2215) 2470,2220 2470,4265 4655,4265 4655,2215 cw(c4565,2215) 4565,2125 4040,2125 4040,2220 3510,2220 3510,2125 2560,2125